# Altium PCB PCB1.PcbDoc (part 2 of 2)
Units mm, origin at the board's own origin, x right, y up, seen from the top; angles counter-clockwise.
Board outline 66.9 x 83.08 mm, 2 copper layers (Top Layer, Bottom Layer); 80 components, 71 nets, 363 pads, 140 vias.
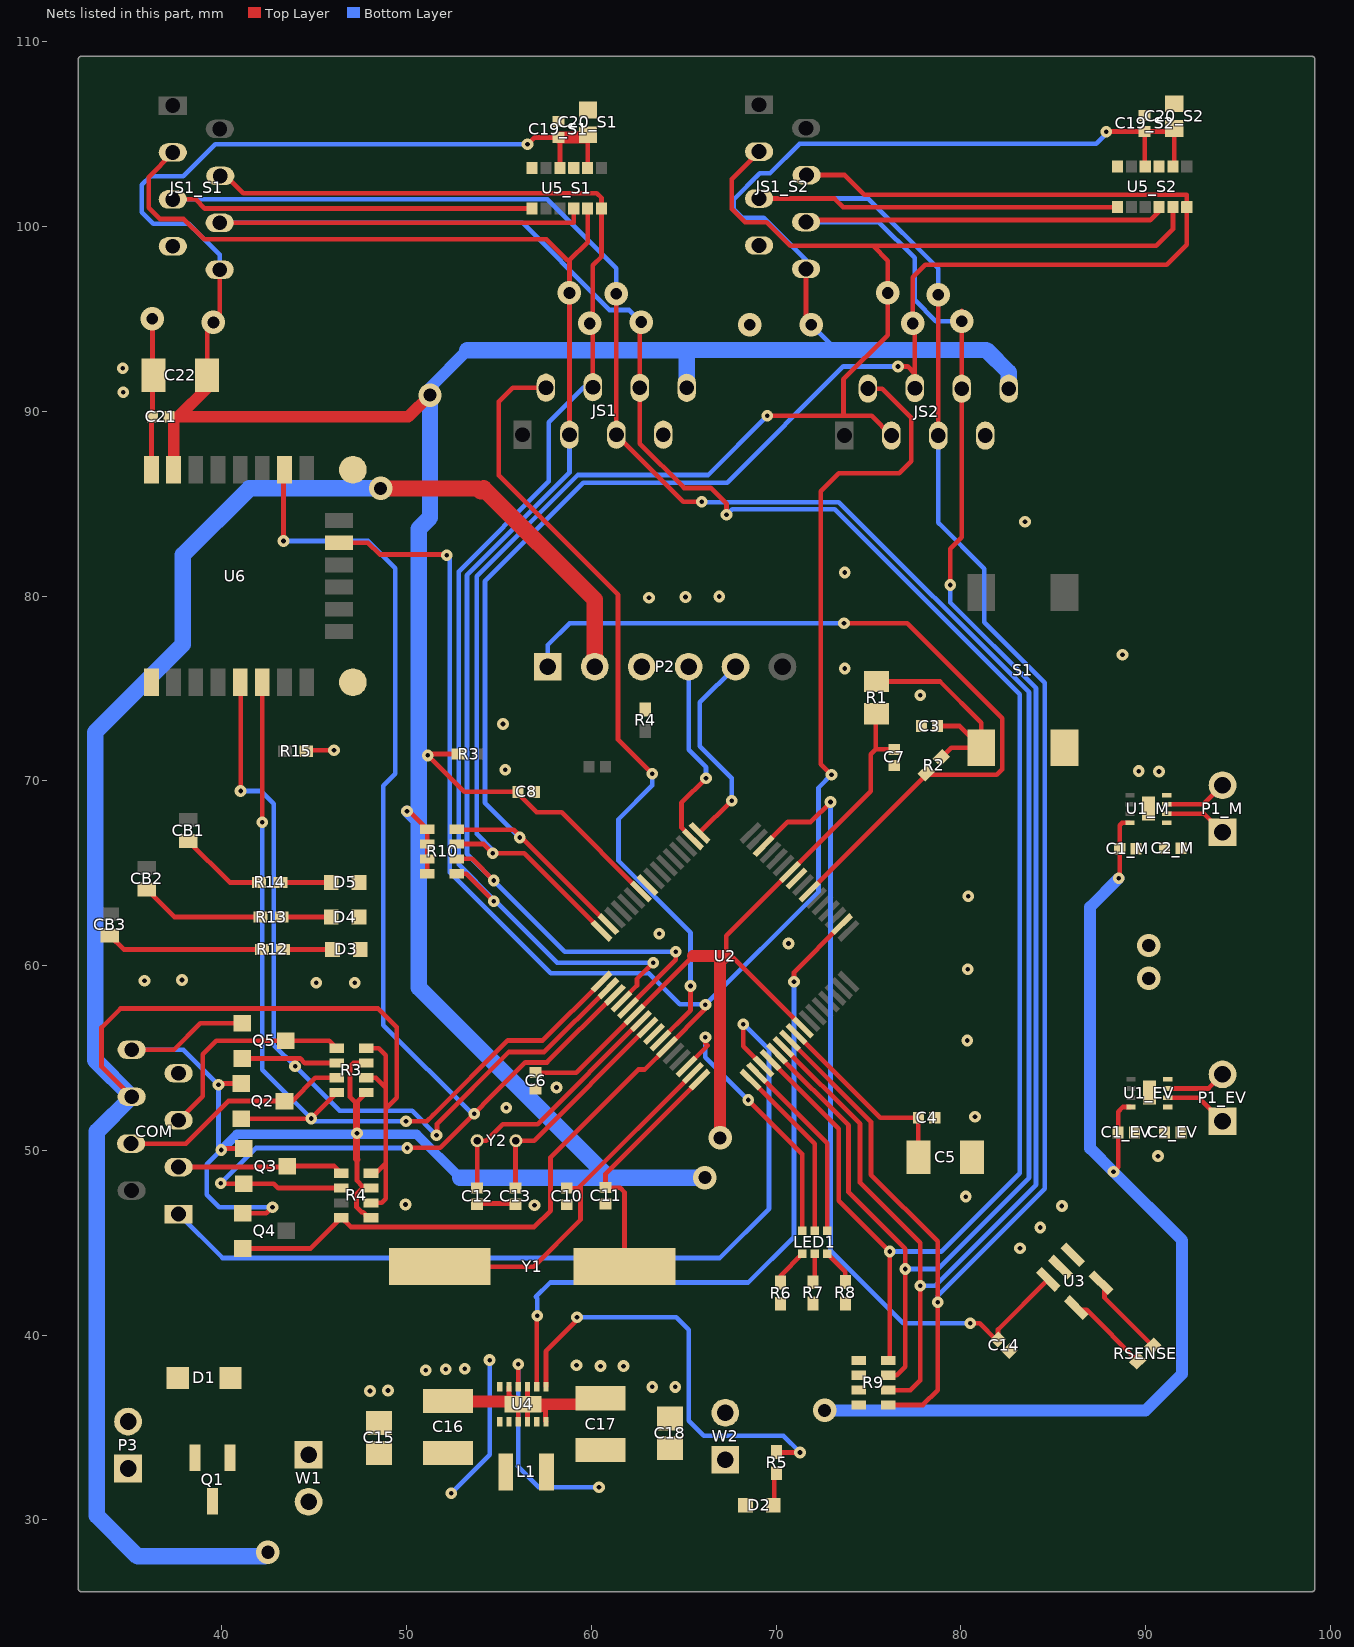
[diagram p2: the nets of this part, all layers, seen from the top]

## Via types
v1: diameter 0.635, hole 0.254, Top Layer to Bottom Layer, 112 vias
v2: diameter 1.27, hole 0.635, Top Layer to Bottom Layer, 12 vias
v3: diameter 0.635, hole 0.254, Top Layer to Bottom Layer, tented top, 8 vias
v4: diameter 1.27, hole 0.711, Top Layer to Bottom Layer, 8 vias

## Nets (pads, with @x,y where several pads share a name; then routed paths per layer and width w, separated by ;. In a path a pad name is that pad's centre, name@x,y a point inside that pad or via, vN(x,y) a via of type N, cw(c..) or ccw(c..) an arc to the next point about the centre after c; other vN are vias at no path point) (continued)
G0_S1: JS1.3 JS1_S1.3 R9.8 U2.52 U5_S1.4 | length 132
  Top Layer w0.254: JS1_S1.3@39.895,100.195 59.055,100.195 U5_S1.4@59.055,100.97 ; v2@62.6,94.825 62.63,94.795 JS1.3@62.63,91.27 62.63,88.245 65.025,85.85 66.475,85.85 67.325,85 v1(67.325,84.4) ; U2.52@69.681,54.885 73.39,51.175 73.39,47.285 v1(76.15,44.525) 76.15,38.7 R9.8@76.075,38.625
  Bottom Layer w0.254: JS1_S1.3@39.895,100.195 56.282,100.195 60.471,96.006 60.471,95.997 60.992,95.476 62.049,95.476 v2(62.7,94.825) ; v1(67.325,84.4) 67.625,84.7 73.175,84.7 83.185,74.69 83.185,48.768 78.942,44.525 v1(76.15,44.525)
G0_S2: JS1_S2.3 JS2.3 R9.6 U2.54 U5_S2.4 | length 112.6
  Top Layer w0.254: U2.54@70.388,55.592 74.55,51.43 74.55,48.259 77.8,45.009 v1(77.8,42.675) 77.8,37.55 77.275,37.025 R9.6@76.05,37.025 ; JS1_S2.3@71.625,100.24 71.73,100.345 90.255,100.345 90.73,100.82 U5_S2.4@90.73,101.045 ; v1(79.425,80.6) 79.425,82.55 80.055,83.18 JS2.3@80.055,91.22 80.055,95.42 v2@80.05,95.425
  Bottom Layer w0.254: JS1_S2.3@71.625,100.24 75.56,100.24 77.5,98.3 77.5,96.025 78.65,94.875 v2(80.05,94.875) ; v1(77.8,42.675) 78.616,42.675 84.074,48.133 84.074,75.001 79.425,79.65 v1(79.425,80.6)
G1_S1: JS1.4 JS1_S1.4 R9.7 U2.53 U5_S1.1 | length 138.4
  Top Layer w0.254: JS1_S1.4@37.355,101.465 38.585,101.465 39.08,100.97 U5_S1.1@56.805,100.97 ; v2@61.35,96.375 v2(61.36,96.365) JS1.4@61.36,88.73 64.99,85.1 v1(65.975,85.1) ; U2.53@70.034,55.238 73.925,51.348 73.925,47.741 77,44.666 v1(77,43.575) 77,38.3 76.525,37.825 R9.7@76.05,37.825
  Bottom Layer w0.254: JS1_S1.4@37.355,101.465 57.63,101.465 61.36,97.735 v2(61.36,96.365) ; v1@65.975,85.25 66.15,85.075 67.461,85.075 67.467,85.081 73.394,85.081 83.693,74.782 83.693,48.514 78.754,43.575 v1(77,43.575)
G1_S2: JS1_S2.4 JS2.4 R9.5 U2.55 U5_S2.1 | length 116.8
  Top Layer w0.254: JS1_S2.4@69.085,101.51 73.165,101.51 73.63,101.045 U5_S2.1@88.48,101.045 ; U2.55@70.741,55.945 75.137,51.55 75.137,48.688 78.75,45.075 78.75,37.025 77.95,36.225 R9.5@76.05,36.225 ; v2(78.775,96.3) 78.775,88.77 78.825,88.72 JS2.4@78.785,88.68
  Bottom Layer w0.254: JS1_S2.4@69.085,101.51 74.99,101.51 78.775,97.725 v2(78.775,96.3) ; v1(78.75,41.775) 78.75,42.125 84.55,47.925 84.55,75.314 81.275,78.589 81.275,81.475 78.825,83.925 ; 78.785,83.965 JS2.4@78.785,88.68
GND: C1_EV.2 C1_M.2 C2_EV.1 C2_M.1 C3.2 C4.2 C5.2 C6.1 C7.2 C8.1 C10.2 C11.2 C12.2 C13.2 C14.2 C15.2 C16.2 C17.2 C18.2 C19_S1.1 C19_S2.1 C20_S1.1 C20_S2.1 C21.2 C22.2 COM.2 D1.1 D3.2 D4.2 D5.2 JS1.2 JS1_S1.2 JS1_S2.2 JS2.2 P2.3 P3.2 Q1.2 R4.1@62.925,73.851 R15.2 S1.2 U1_EV.4 U1_M.4 U2.9 U2.25 U2.41 U3.1 U3.2 U4.3 U4.4 U4.6 U4.9 U4.11 U5_S1.9 U5_S1.12 U5_S2.9 U5_S2.12 U6.1 U6.9 U6.16 U6.24 | length 24.6
  Top Layer w0.254: U6.24@36.2,86.833 36.2,89.642 C21.2@36.26,89.702 C22.2@36.26,91.525 ; v2@36.26,94.485 36.26,92.005 36.5,91.765 C22.2@36.315,91.58 ; R15.2@44.65,71.652 v1(46.075,71.652) ; C12.2@54,47.125 C13.2@55.675,47.125 ; U4.11@55.55,37.212 55.55,36.775 55.913,36.412 56.15,36.412 U4.3@56.3,36.262 ; U4.3@56.05,35.312 56.05,36.012 U4.3@56.3,36.262 ; U4.4@56.55,35.312 U4.3@56.55,36.012 ; U4.3@56.55,36.512 U4.9@56.55,37.212 ; U4.6@57.55,35.312 57.525,35.337 57.525,35.975 56.587,35.975 U4.3@56.55,36.012 ; C10.2@58.625,47.125 C10.2@58.675,47.075 ; U2.25@63.034,64.36 63.034,64.369 U2.25@63.043,64.36 ; v1(77.8,74.625) v1@77.864,74.561 ; C4.2@78.59,51.632 C4.2@78.59,51.765 ; U4.3@56.3,36.262 U4.3@56.55,36.012
  Top Layer w0.635: C16.2@52.125,36.412 U4.3@55.913,36.412 ; U4.3@56.3,36.262 C17.2@60.075,36.262
  other v1: 48.025,36.975 49,37 63.3,37.2 64.55,37.2 51.05,38.1 52.125,38.15 53.15,38.175 60.5,38.325 61.75,38.325 59.2,38.375 56.925,47.025 49.95,47.075 55.4,52.3 58.125,53.398 80.35,55.95 45.125,59.075 47.2,59.075 35.825,59.175 37.85,59.225 80.375,59.8 70.671,61.196 63.675,61.725 80.4,63.75 55.35,70.6 55.225,73.075 73.725,76.075 88.75,76.825 63.125,79.9 65.1,79.95 66.925,79.975 73.725,81.275 83.475,84.025 34.675,91.025 34.65,92.325
  other v2: 68.577,94.675 36.25,95
  other v3: 83.2,44.7 84.3,45.825 85.471,46.99 80.264,47.498 90.671,49.69 80.772,51.816 90.725,70.5 89.625,70.525
  other v4: 90.17,59.309 90.17,61.087
I2C0_S1: JS1.5 JS1_S1.5 R10.5 U2.36 U5_S1.6 | length 78.9
  Top Layer w0.254: JS1_S1.5@39.925,102.735 40.225,102.735 41.16,101.8 60.3,101.8 60.555,101.545 U5_S1.6@60.555,100.97 60.555,98.355 60.09,97.89 JS1.5@60.09,91.3 ; R10.5@52.725,64.975 53.225,64.975 v1(54.725,63.475) ; U2.36@61.62,58.067 62.475,58.922 62.475,59.275 v1(63.35,60.15)
  Bottom Layer w0.254: JS1.5@60.09,91.3 59.6,91.3 57.7,89.4 57.7,86.2 52.825,81.325 52.825,65.475 54.725,63.575 v1(54.725,63.475) 54.825,63.475 58.15,60.15 v1(63.35,60.15)
  other v2: 59.925,94.75
I2C0_S2: JS1_S2.5 JS2.5 R10.8 U2.31 U5_S2.6 | length 98.5
  Top Layer w0.254: R10.8@52.725,67.35 55.801,67.35 U2.31@60.913,62.239 ; JS1_S2.5@71.655,102.78 73.72,102.78 74.78,101.72 92.23,101.72 U5_S2.6@92.23,101.045 92.23,99.005 91.15,97.925 78.075,97.925 77.4,97.25 v2(77.4,94.75) 77.515,94.635 77.515,92.035 ; v1(76.6,92.425) 77.125,92.425 77.515,92.035 ; JS2.5@77.515,91.25 77.515,92.035
  Bottom Layer w0.254: v1(56.134,66.927) 54.25,68.811 54.25,80.8 59.575,86.125 67.35,86.125 73.65,92.425 v1(76.6,92.425)
I2C1_S1: JS1.6 JS1_S1.6 R10.6 U2.37 U5_S1.5 | length 85.2
  Top Layer w0.254: JS1_S1.6@37.355,103.977 36.05,102.672 36.05,101.025 36.675,100.4 37.95,100.4 39.05,99.3 57.575,99.3 58.705,98.17 58.82,98.17 ; R10.6@52.725,65.775 53.55,65.775 v1(54.725,64.6) ; JS1.6@58.82,88.73 v2(58.82,96.4) 58.82,98.17 ; U5_S1.5@59.805,100.97 59.805,99.155 58.82,98.17 ; U2.37@61.973,57.713 64.575,60.315 v1(64.575,60.75)
  Bottom Layer w0.254: JS1.6@58.82,88.73 58.82,86.67 53.275,81.125 53.275,66.05 v1(54.725,64.6) 58.575,60.75 v1(64.575,60.75)
I2C1_S2: JS1_S2.6 JS2.6 R10.7 U2.32 U5_S2.5 | length 92.1
  Top Layer w0.254: R10.7@52.725,66.575 54.173,66.575 v1(54.675,66.073) 56.371,66.073 U2.32@60.559,61.885 ; JS1_S2.6@69.085,104.05 67.6,102.565 67.6,100.95 68.325,100.225 69.5,100.225 70.775,98.95 75.25,98.95 ; v1(69.525,89.75) 73.65,89.75 ; JS2.6@76.245,88.68 75.175,89.75 73.65,89.75 ; U5_S2.5@91.48,101.045 91.48,99.846 90.584,98.95 75.25,98.95 ; 73.65,89.75 73.65,91.725 76.05,94.125 v2(76.05,96.4) 76.05,98.15 75.25,98.95
  Bottom Layer w0.254: v1(54.675,66.073) 54.675,66.25 53.8,67.125 53.8,81.075 59.275,86.55 66.325,86.55 v1(69.525,89.75)
IMSENSE: C14.1 U2.14 U3.3 | length 44.3
  Top Layer w0.254: U2.14@69.336,66.481 70.63,67.775 71.875,67.775 v1(72.95,68.85) ; v1(80.518,40.64) 81.026,40.64 81.905,39.761 C14.1@82.014,39.761 82.014,40.303 U3.3@84.725,43.014
  Bottom Layer w0.254: v1(72.95,68.85) 72.95,44.575 76.885,40.64 v1(80.518,40.64)
INT1: JS1.7 U2.42 | length 43.9
  Top Layer w0.254: JS1.7@57.55,91.275 55.75,91.275 55,90.525 55,86.525 61.45,80.075 61.45,72.225 v1(63.3,70.375) ; U2.42@63.741,55.945 63.745,55.945 65.375,57.575 v1(65.375,58.9)
  Bottom Layer w0.254: v1(63.3,70.375) 63.3,69.75 61.475,67.925 61.475,65.675 65.375,61.775 v1(65.375,58.9)
LED0: LED1.6 U2.46 | length 14.8
  Top Layer w0.254: U2.46@65.155,54.531 66.3,55.676 66.178,55.798 v1(66.178,56.128) ; v1(68.5,52.725) 71.425,49.8 71.425,45.652 LED1.6@71.427,45.65
  Bottom Layer w0.254: v1(66.178,56.128) 66.178,55.047 v1(68.5,52.725)
LED1: LED1.5 U2.49 | length 9.6
  Top Layer w0.254: U2.49@68.629,53.824 72.1,50.353 72.1,45.652 LED1.5@72.102,45.65
LED2: LED1.4 U2.50 | length 10.1
  Top Layer w0.254: U2.50@68.982,54.178 72.775,50.385 LED1.4@72.777,45.65
NetC3_1: C3.1 R1.1 R2.2 S1.1 | length 13.2
  Top Layer w0.254: R1.1@75.45,75.375 78.875,75.375 81.111,73.139 S1.1@81.111,71.79 ; C3.1@78.744,72.965 79.936,72.965 S1.1@81.111,71.79 ; R2.2@78.941,71.237 79.494,71.79 S1.1@81.111,71.79
NetC4_1: C4.1 C5.1 U2.56 | length 10.6
  Top Layer w0.254: U2.56@71.104,56.299 72.131,55.271 75.638,51.765 C4.1@77.71,51.765 77.7,51.755 C5.1@77.7,49.622
NetC10_1: C10.1 U2.47 Y1.2 | length 19.9
  Top Layer w0.254: Y1.2@51.8,43.709 56.884,43.709 59.42,46.245 59.42,48.08 ; C10.1@58.675,47.955 59.295,47.955 59.42,48.08 ; U2.47@65.518,54.178 59.42,48.08
NetC11_1: C11.1 U2.48 Y1.1 | length 13.1
  Top Layer w0.254: Y1.1@61.8,43.709 61.8,47.74 61.56,47.98 C11.1@60.775,47.98 60.775,48.728 U2.48@65.871,53.824
NetC12_1: C12.1 U2.39 Y2.1 | length 14.1
  Top Layer w0.254: C12.1@53.825,47.965 Y2.1@53.825,50.525 54.325,50.525 55.221,51.421 57.104,51.421 U2.39@62.689,57.006
NetC13_1: C13.1 U2.40 Y2.2 | length 12.2
  Top Layer w0.254: C13.1@55.9,47.965 55.9,50.525 Y2.2@55.925,50.525 56.915,50.525 U2.40@63.043,56.652
NetC17_1: C17.1 C18.1 D2.1 L1.2 U4.5 U4.10 W2.1 | length 11.6
  Top Layer w0.254: U4.10@56.05,37.212 v1(56.05,38.425)
  Bottom Layer w0.254: v1(56.05,38.425) 56.05,32.925 56.025,32.9 57.15,31.775 v1(60.425,31.775)
NetCB1_2: CB1.2 R14.2 | length 4.7
  Top Layer w0.254: CB1.2@38.2,66.733 40.433,64.5 R14.2@42.025,64.5
NetCB2_2: CB2.2 R13.2 | length 6.9
  Top Layer w0.254: CB2.2@35.95,64.125 37.45,62.625 R13.2@42.1,62.625 R13.2@42.025,62.55
NetCB3_2: CB3.2 R12.2 | length 8.8
  Top Layer w0.254: CB3.2@33.95,61.625 34.7,60.875 R12.2@42.175,60.875 R12.2@42,61.05
NetD1_2: D1.2 Q1.1 W1.1
NetD2_2: D2.2 R5.2 | length 1.6
  Top Layer w0.254: D2.2@69.9,30.946 R5.2@69.9,32.5
NetD3_1: D3.1 R12.1 | length 2.7
  Top Layer w0.254: R12.1@43.325,60.875 D3.1@46,60.875
NetD4_1: D4.1 R13.1 | length 2.7
  Top Layer w0.254: R13.1@43.25,62.625 D4.1@45.925,62.625
NetD5_1: D5.1 R14.1 | length 2.7
  Top Layer w0.254: R14.1@43.175,64.5 D5.1@45.925,64.5
NetL1_1: L1.1 U4.2
NetLED1_1: LED1.1 R6.1 | length 2
  Top Layer w0.254: R6.1@70.25,42.85 70.25,43.223 LED1.1@71.427,44.4
NetLED1_2: LED1.2 R7.1 | length 1.4
  Top Layer w0.254: R7.1@72.102,42.952 LED1.2@72.102,44.4
NetLED1_3: LED1.3 R8.1 | length 1.9
  Top Layer w0.254: LED1.3@72.777,44.4 73.75,43.427 R8.1@73.75,42.869
NetP1_EV_1: P1_EV.1 U1_EV.2 | length 3.5
  Top Layer w0.254: U1_EV.2@91.206,52.848 92.89,52.848 P1_EV.1@94.165,51.573
NetP1_EV_2: P1_EV.2 U1_EV.3 | length 3.3
  Top Layer w0.254: U1_EV.3@91.206,53.348 93.4,53.348 P1_EV.2@94.165,54.113
NetP1_M_1: P1_M.1 U1_M.2 | length 3.4
  Top Layer w0.254: U1_M.2@91.15,68.225 93.161,68.225 P1_M.1@94.165,67.221
NetP1_M_2: P1_M.2 U1_M.3 | length 3.4
  Top Layer w0.254: U1_M.3@91.15,68.725 93.129,68.725 P1_M.2@94.165,69.761
NetP3_1: P3.1 Q1.3
PGC2: P2.5 U2.17 | length 11.5
  Top Layer w0.254: U2.17@65.884,67.21 v1(67.6,68.926) v1@67.715,69.041
  Bottom Layer w0.254: v1@67.715,69.041 v1(67.6,68.926) 67.6,70.15 65.875,71.875 65.875,74.24 P2.5@67.81,76.175
PGD2: P2.4 U2.18 | length 10.5
  Top Layer w0.254: U2.18@65.509,66.835 65.509,66.847 64.88,67.475 64.88,68.805 v1(66.213,70.138)
  Bottom Layer w0.254: P2.4@65.27,76.175 65.27,71.68 66.213,70.738 v1(66.213,70.138)
PWM: COM.8 U2.51 | length 47.3
  Top Layer w0.254: v1(68.225,56.825) 68.225,55.642 U2.51@69.336,54.531
  Bottom Layer w0.254: COM.8@37.67,46.555 40.05,44.175 66.95,44.175 69.625,46.85 69.625,55.45 v1@68.3,56.775
PWRGOOD: R5.1 U4.7 | length 23.9
  Top Layer w0.254: U4.7@57.55,37.212 57.55,39.125 59.225,40.8 v1(59.225,40.975) ; R5.1@69.9,33.65 v1(71.3,33.65)
  Bottom Layer w0.254: v1(59.225,40.975) 64.6,40.975 65.275,40.3 65.275,35.375 66.1,34.55 70.4,34.55 v1(71.3,33.65)
RST: P2.1 R2.1 U2.7 | length 44.4
  Top Layer w0.254: U2.7@71.811,64.006 78.128,70.323 81.948,70.323 82.242,70.617 82.242,73.376 77.093,78.525 v1@73.55,78.525
  Bottom Layer w0.254: P2.1@57.65,76.175 57.65,77.35 58.825,78.525 v1(73.675,78.525)
RTS: COM.6 Q3.1 R4.5 | length 9
  Top Layer w0.254: COM.6@37.67,49.095 43.495,49.095 Q3.1@43.55,49.15 46.084,49.15 R4.5@46.475,48.759
RX: COM.4 Q5.1 R3.5 | length 11.8
  Top Layer w0.254: COM.4@37.67,51.635 38.975,52.94 38.975,55.2 39.7,55.925 Q5.1@43.475,55.925 45.825,55.925 R3.5@46.225,55.525
TX: COM.5 Q2.1 R3.7 | length 12.6
  Top Layer w0.254: COM.5@35.1,50.365 38.065,50.365 40.368,52.668 Q2.1@43.4,52.668 43.818,52.668 45.075,53.925 R3.7@46.225,53.925
UART10: Q5.3 R3.6 U2.34 U6.5 | length 50
  Top Layer w0.254: U6.5@41,75.333 41.025,75.308 v1(41.025,69.45) ; Q5.3@41.125,54.975 44.25,54.975 44.5,54.725 R3.6@46.225,54.725 ; v1@51.65,50.825 51.65,51.425 55.55,55.325 57.464,55.325 U2.34@60.913,58.774
  Bottom Layer w0.254: v1(41.025,69.45) 42.125,69.45 42.825,68.75 42.825,55.7 v1(43.975,54.55) 46.379,52.146 50.303,52.146 v1(51.625,50.825)
UART11: Q2.3 R3.8 U2.33 U6.6 | length 49.4
  Top Layer w0.254: Q2.3@41.05,51.718 44.818,51.718 R3.8@46.225,53.125 ; v1(42.2,67.75) U6.6@42.2,75.333 ; v1(49.975,51.575) 51.1,51.575 51.437,51.912 55.475,55.95 57.382,55.95 U2.33@60.559,59.127
  Bottom Layer w0.254: v1(42.2,67.75) 42.2,54.375 v1(44.85,51.725) 44.95,51.625 44.975,51.65 45.05,51.575 v1(49.975,51.575)
UART12: JS2.7 Q4.3 R4.8 U2.43 U6.14 | length 114.7
  Top Layer w0.254: Q4.3@41.15,44.693 44.809,44.693 R4.8@46.475,46.359 46.979,45.855 56.912,45.855 57.8,46.743 57.8,49.633 62.538,54.371 62.883,54.371 U2.43@64.103,55.592 66.178,57.667 v1@66.178,57.719 ; U6.14@46.35,82.883 47.917,82.883 48.55,82.25 52.128,82.25 v1(52.178,82.2) ; v1(66.178,57.878) v1@66.178,57.719 ; v1@66.2,57.697 v1@66.178,57.719 ; v1(73,70.325) 72.425,70.9 72.425,85.675 73.4,86.65 76.675,86.65 77.325,87.3 77.325,89.65 75.75,91.225 JS2.7@74.975,91.225
  Bottom Layer w0.254: v1(52.178,82.2) 52.35,82.028 52.35,65.042 57.813,59.578 63.122,59.578 64.8,57.9 66.156,57.9 v1(66.178,57.878) 72.3,64 72.3,69.625 v1(73,70.325)
UART13: Q3.3 R4.6 U2.35 U6.18 | length 74.6
  Top Layer w0.254: v1(39.95,48.225) 39.975,48.2 Q3.3@41.2,48.2 42.825,48.2 43.066,47.959 R4.6@46.475,47.959 ; v1(43.35,82.975) U6.18@43.35,86.833 ; v1@50.05,50.15 51.825,50.15 56.434,54.759 57.605,54.759 U2.35@61.266,58.42
  Bottom Layer w0.254: v1(39.95,48.225) 41.85,50.125 v1(50.05,50.125) ; v1(43.35,82.975) 47.925,82.975 49.4,81.5 49.4,70.375 48.75,69.725 48.75,56.775 53.55,51.975 v1(53.675,51.975)
VBAT: C15.1 C16.1 COM.3 P2.2 R3.2@47.825,53.925 R3.4 R4.2@48.075,47.159 R4.4 RSENSE.2 U3.4 U4.1 U4.12 W1.2 | length 146.3
  Top Layer w0.254: COM.3@35.13,52.905 33.5,54.535 33.5,56.65 34.525,57.675 48.475,57.675 49.475,56.675 49.475,52.85 48.875,52.25 ; R3.2@47.825,53.925 48.35,53.925 48.875,53.4 ; R3.4@47.825,55.525 48.5,55.525 48.875,55.15 48.875,53.4 ; R4.2@48.075,47.159 48.659,47.159 48.875,47.375 48.875,49.3 ; R4.4@48.075,48.759 48.334,48.759 48.875,49.3 ; U3.4@86.431,41.381 86.805,41.381 RSENSE.2@89.587,38.6 ; 48.875,49.3 48.875,52.25 ; 48.875,52.25 48.875,53.4
  Top Layer w0.889: v4(48.6,85.825) 48.606,85.818 53.89,85.818 54.029,85.679 54.175,85.825 60.19,79.81 P2.2@60.19,76.175
  Bottom Layer w0.254: v1(52.425,31.45) 54.5,33.525 v1(54.5,38.65)
  Bottom Layer w0.889: v4@42.5,28.2 42.325,28.025 35.45,28.025 33.25,30.225 33.25,51.025 COM.3@35.13,52.905 33.15,54.885 33.15,72.625 37.9,77.375 37.9,82.225 41.5,85.825 v4(48.6,85.825)
  other v4: 42.5,28.25
VCC: C1_EV.1 C1_M.1 C6.2 C7.1 C8.2 C19_S1.2 C19_S2.2 C20_S1.2 C20_S2.2 C21.1 C22.1 COM.1 JS1.1 JS1_S1.1 JS1_S2.1 JS2.1 Q2.2 Q3.2 Q4.2 Q5.2 R1.2 R3.1 R3.3 R4.1@48.075,46.359 R4.3 R6.2 R7.2 R8.2 R9.1 R9.2 R9.3 R9.4 R10.1 R10.2 R10.3 R10.4 U1_EV.8 U1_M.8 U2.10 U2.26 U2.38 U2.57 U5_S1.8 U5_S1.10 U5_S2.8 U5_S2.10 U6.23 W2.2 | length 375.4
  Top Layer w0.254: COM.1@35.13,55.445 37.42,55.445 38.85,56.875 Q5.2@41.125,56.875 ; C21.1@37.4,89.442 37.66,89.702 ; C22.1@39.215,91.257 C22.1@39.215,91.95 39.215,94.465 39.895,95.145 JS1_S1.1@39.895,97.655 ; v1(39.825,53.55) 39.893,53.618 Q2.2@41.05,53.618 ; v1(39.975,50.025) 40.05,50.1 Q3.2@41.2,50.1 ; Q4.2@41.15,46.593 42.418,46.593 v1(42.75,46.925) ; 47.3,52.525 46.95,52.875 46.95,54.55 47.125,54.725 R3.3@47.825,54.725 ; 47.3,52.55 47.25,52.55 R3.1@47.825,53.125 ; 47.325,49.5 47.325,48.35 47.609,48.066 47.609,47.959 47.3,47.65 47.3,46.925 47.57,46.655 47.664,46.655 47.802,46.517 47.802,46.423 47.866,46.359 R4.1@48.075,46.359 ; v1(50.025,68.35) 50.15,68.35 R10.1@51.125,67.375 R10.2@51.125,66.575 R10.3@51.125,65.775 R10.4@51.125,64.975 ; R3.1@52.8,71.45 51.225,71.45 v1(51.15,71.375) 53.125,69.4 56.025,69.4 56.025,69.318 57.043,68.3 58.396,68.3 U2.26@62.689,64.006 ; v1(56.55,104.45) 56.91,104.81 C19_S1.2@58.221,104.81 58.305,104.726 U5_S1.10@58.305,103.17 ; C6.2@56.991,54.205 59.181,54.205 65.491,60.515 ; C20_S1.2@59.681,104.81 C20_S1.2@59.805,104.934 ; U5_S1.8@59.805,103.17 C20_S1.2@59.805,104.934 ; C20_S1.2@59.825,104.954 C20_S1.2@59.805,104.934 ; U2.57@71.457,56.652 67.595,60.515 67.3,60.515 67.3,61.617 75.125,69.442 75.125,71.44 75.39,71.705 ; JS1_S2.1@71.625,97.7 71.625,94.95 v2(71.9,94.675) ; R1.2@75.45,73.625 75.39,73.565 75.39,71.705 ; C7.1@76.4,71.705 75.39,71.705 ; v1(87.875,105.125) 87.885,105.135 C19_S2.2@89.95,105.135 ; v1(88.263,48.837) 88.516,49.091 C1_EV.1@88.516,50.969 88.516,52.089 88.775,52.348 U1_EV.8@89.206,52.348 ; v1(88.55,64.725) 88.6,64.775 C1_M.1@88.6,66.321 88.6,67.6 88.725,67.725 U1_M.8@89.15,67.725 ; U5_S2.10@89.98,103.245 89.95,103.275 C19_S2.2@89.95,105.135 ; U5_S2.8@91.48,103.245 91.554,103.319 C20_S2.2@91.554,105.3 91.389,105.135 C19_S2.2@89.95,105.135
  Top Layer w0.381: 47.3,52.55 47.3,49.525 47.325,49.5
  Top Layer w0.635: U6.23@37.4,86.833 C21.1@37.4,89.442 ; C22.1@39.215,91.257 37.66,89.702 50.102,89.702 v4(51.275,90.875) ; C19_S1.2@58.221,104.81 C20_S1.2@59.681,104.81 ; 65.491,60.515 67.3,60.515 66.953,60.168 66.975,60.147 v4(66.975,50.675)
  Bottom Layer w0.254: COM.1@35.13,55.445 37.93,55.445 v1(39.825,53.55) 39.825,50.175 v1(39.975,50.025) 39.2,49.25 39.2,47.6 39.875,46.925 v1(42.75,46.925) ; JS1_S1.1@39.895,97.655 39.895,98.48 38.225,100.15 36.3,100.15 35.675,100.775 35.675,102.25 36.15,102.725 37.925,102.725 39.65,104.45 v1(56.55,104.45) ; JS1_S2.1@71.625,97.7 71.625,98.175 69.325,100.475 68.175,100.475 67.7,100.95 67.7,101.453 69.122,102.875 69.675,102.875 71.275,104.475 87.325,104.475 v1@87.95,105.1 ; v2@71.9,94.4 v2(71.9,94.675) 73.2,93.375 73.2,93.314
  Bottom Layer w0.508: v1(39.975,50.025) 40.825,50.875 50.55,50.875 52.9,48.525
  Bottom Layer w0.635: v1(50.025,68.35) 50.675,67.7 ; v4(51.275,90.875) 51.275,91.275 53.3,93.3 ; v4(72.625,35.925) 90,35.925 91.975,37.9 91.975,45.125 v1(88.263,48.837) 86.995,50.105 86.995,63.17 v1(88.55,64.725)
  Bottom Layer w0.889: v4(51.275,90.875) 51.275,84.25 50.675,83.65 50.675,67.7 50.675,58.8 60.95,48.525 ; 52.9,48.525 60.95,48.525 ; 53.3,93.3 65.17,93.3 JS1.1@65.17,91.27 ; 65.17,93.314 73.2,93.314 81.386,93.314 82.595,92.105 JS2.1@82.595,91.22 ; v4(66.15,48.525) 60.95,48.525
  other v1: 47.325,50.925
  other v2: 39.555,94.805
VCCSEL: U2.2 U4.8 | length 38.2
  Top Layer w0.254: U4.8@57.05,37.212 57.05,41.025 v1(57.075,41.05) ; v1(70.975,59.125) 70.975,59.644 U2.2@73.57,62.239
  Bottom Layer w0.254: v1(57.075,41.05) 57.075,42 57,42.075 57.775,42.85 68.5,42.85 70.975,45.325 70.975,53.75 v1(70.975,59.125)
VM: C2_EV.2 C2_M.2 RSENSE.1 U1_EV.1 U1_M.1 U3.5 | length 4.4
  Top Layer w0.254: U3.5@87.775,42.725 87.775,42.038 RSENSE.1@90.4,39.413
pads on no net: JS1_S1.7 JS1_S1.8 JS1_S2.7 JS1_S2.8 P2.6 S1.3 S1.4 U2.4 U2.5 U2.6 U2.8 U2.11 U2.12 U2.13 U2.21 U2.22 U2.28 U2.29 U2.30 U2.58 U2.59 U5_S1.2 U5_S1.3 U5_S1.7 U5_S1.11 U5_S2.2 U5_S2.3 U5_S2.7 U5_S2.11 U6.0 U6.2 U6.3 U6.4 U6.13 U6.17 U6.19 U6.20 U6.21 U6.22

## Polygon pours and split planes (outlines as drawn)
GND on Top Layer "GND_DIGITAL" (solid, pour order 46): 33.747,94.332 98.021,94.332 98.021,72.485 86.587,72.485 86.101,49.731 90.715,45.118 90.715,42.962 89.76,42.008 90.142,40.864 88.617,39.339 86.587,39.339 84.426,37.178 79.473,37.178 79.473,42.77 69.046,42.77 69.046,49.975 68.086,51.575 65.879,51.575 64.896,49.975 64.896,42.341 33.747,42.341
GND on Top Layer "GND_actionneur" (solid, pour order 70): 91.313,59.563 89.088,59.563 89.088,54.557 89.113,54.532 89.813,53.832 89.813,53.582 89.813,51.732 90.613,51.732 90.675,53.721 91.313,53.721
GND on Top Layer "GND_actionneur" (solid, pour order 68): 89.085,59.563 91.31,59.563 91.31,66.617 91.285,66.642 90.585,67.342 90.585,67.592 90.585,69.442 89.785,69.442 89.785,67.317 89.085,66.617
VBAT on Top Layer "VBAT" (solid, pour order 3): 55.2,37 55.2,39.25 53.925,39.25 53.925,37.775 54.9,37.45 54.9,37
AGND on Top Layer "AGND" (solid, pour order 2): 56.538,73.094 56.538,71.762 67.1,61.2 75.687,69.787 72.448,73.027
VM on Top Layer "VMOT" (solid, pour order 42): 94.184,42.646 97.75,46.085 97.75,62.549 94.836,65.667 93.666,65.668 91.589,67.872 90.892,67.872 90.892,67.597 91.587,66.622 91.667,62.97 92.037,62.6 92.387,62.25 95.387,62.25 96.1,61.537 96.1,49.083 95.464,48.725 91.09,52.578 90.787,52.578 90.787,52.175 91.462,51.325 91.438,48.208 93.037,46.609 93.037,43.65 92.888,43.501
VM on Top Layer "VMOT_ISENSE" (solid, pour order 40): 94.197,42.647 93.021,43.566 90.64,41.185 90.45,39.925 90.193,39.588 90.118,40.413 88.514,42.276 87.502,43.288 87.227,43.013 88.239,42.001 89.793,40.338 89.977,39.288 90.322,38.943
VBAT on Top Layer "VBAT_ISENSE" (solid, pour order 38): 78.675,29.75 87.305,38.38 88.851,38.38 89.364,38.893 88.311,39.246 85.943,41.613 86.231,41.901 88.674,39.458 89.589,39.118 90.043,38.663 78.675,27.452
NetP3_1 on Top Layer "VIN" (solid, pour order 36): 33.725,33.5 35.9,33.5 36.075,33.325 36.075,31.6 41.222,31.6 41.263,29.3 35.35,29.3 33.75,30.9 33.75,33.5
NetD1_2 on Top Layer "VD" (solid, pour order 34): 39.475,32.65 45.425,32.65 45.425,34.875 45.475,34.925 42.1,38.3 42.025,38.3 39.475,38.3
GND on Top Layer "GND_actionneur" (solid, pour order 30): 91.35,71.175 89.068,71.175 89.068,70.143 89.093,70.118 89.793,69.418 89.793,69.168 89.793,67.318 90.593,67.318 90.593,69.168 91.35,69.168
NetP1_M_1 on Top Layer "NetP1_MOTOR_1" (solid, pour order 26): 91.041,68.362 91.066,68.337 95.1,68.337 95.1,66.35 93.277,66.35 91.816,68.112 91.516,68.112 91.066,68.112 91.041,68.137 91.041,68.312 91.016,68.337
NetP1_EV_2 on Top Layer "A3" (solid, pour order 20): 91.006,53.194 91.031,53.219 95.25,53.219 95.25,55.119 93.456,55.119 91.781,53.444 91.481,53.444 91.031,53.444 91.006,53.419 91.006,53.244 90.981,53.219
NetP1_EV_1 on Top Layer "A4" (solid, pour order 18): 90.981,52.994 91.006,52.969 95.25,52.969 95.25,50.673 93.431,50.673 93.431,51.069 91.756,52.744 91.456,52.744 91.006,52.744 90.981,52.769 90.981,52.944 90.956,52.969
GND on Top Layer "GND_actionneur" (solid, pour order 16): 89.106,50.419 91.177,48.514 91.177,51.426 90.606,51.998 90.606,52.248 90.606,54.098 89.806,54.098 89.806,51.973 89.106,51.273
NetL1_1 on Top Layer "L1" (solid, pour order 14): 55.725,30.175 53.45,30.175 53.45,32.329 55.025,34.563 55.35,34.987 55.35,35.588 55.725,35.588
VBAT on Top Layer "VBAT" (solid, pour order 12): 54.45,35.527 55.125,35.527 55.125,35.06 54.6,35.06 52.95,32.675 52.95,29.725 81,29.725 78.752,27.477 53.4,27.477 41.675,27.477 41.675,32.475 41.675,30.224 41.675,31.85 45.975,31.85 45.975,34.202 47.475,34.202 51.9,34.202
NetC17_1 on Top Layer "L2" (solid, pour order 10): 56.875,35.073 56.875,35.598 57.25,35.598 57.25,34.948 57.725,34.4 61.7,34.4 63.35,34.4 63.45,34.5 68.3,34.5 68.3,30.223 56.9,30.223
GND on Top Layer "GND_DIGITAL" (solid, pour order 8): 33.735,42.575 64.859,42.575 64.859,34.9 63.298,34.9 61.66,35.741 54.735,35.741 50.735,35.741 50.023,34.65 46.109,34.65 42.264,38.495 39.189,38.495 39.189,34.397 39.189,32.445 36.714,32.445 36.714,34.397 33.735,34.397
VCC on Top Layer "VCC" (solid, pour order 4): 65.3,36.425 66.825,34.725 74.425,34.725 74.425,41.925 68.707,41.925 68.707,49.775 67.797,50.975 66.103,50.975 65.3,49.775
NetP1_M_2 on Top Layer "A1" (solid, pour order 24): 91.031,68.596 91.056,68.621 95.123,68.621 95.123,70.721 93.481,70.721 93.481,70.521 91.806,68.846 91.506,68.846 91.056,68.846 91.031,68.821 91.031,68.646 91.006,68.621
GND on Top Layer "GND_S1" (solid, pour order 72): 35.125,108.68 62.969,108.68 62.969,95.23 35.125,95.23
GND on Top Layer "GND_S1" (solid, pour order 74): 66.725,95.285 66.725,108.685 94.382,108.685 94.382,95.285
GND on Bottom Layer "GND_DIGITAL" (solid, pour order 54): 33.868,94.107 98.2,94.107 98.2,72.475 86.355,72.475 86.355,49.28 79.175,42.1 33.868,42.1
GND on Bottom Layer "GND_actionneur" (solid, pour order 66): 46.475,34.55 46.525,34.6 49.9,34.6 49.9,30.025 74.803,30.025 85.27,30.025 93.641,38.396 93.641,46.016 87.757,51.901 87.757,71.75 98.125,71.75 98.125,27.305 46.475,27.305
AGND on Bottom Layer "AGND" (solid, pour order 28): 56.575,73.292 56.575,70.825 56.7,70.825 67.128,60.397 76.581,69.85 73.209,73.222
GND on Bottom Layer "Top Layer-No Net" (solid, pour order 6): 33.867,42.123 78.867,42.123 86.254,49.509 90.868,44.895 90.868,38.862 89.218,37.211 65.532,37.211 65.532,35.9 54.929,35.9 50.929,35.9 50.033,34.525 33.867,34.525

## Keep-outs
Keep-Out Layer:
  lines w0.254: 32.375,26.25 99.025,26.25 99.025,109.075 32.375,109.075 32.375,26.25